# Altium PCB AC_Board.PcbDoc
Units mil, origin at the board's own origin, x right, y up, seen from the top; angles counter-clockwise.
Board outline 6000 x 4000 mil, 2 copper layers (Top Layer, Bottom Layer); 6 components, 27 nets, 18 pads, 6 vias.
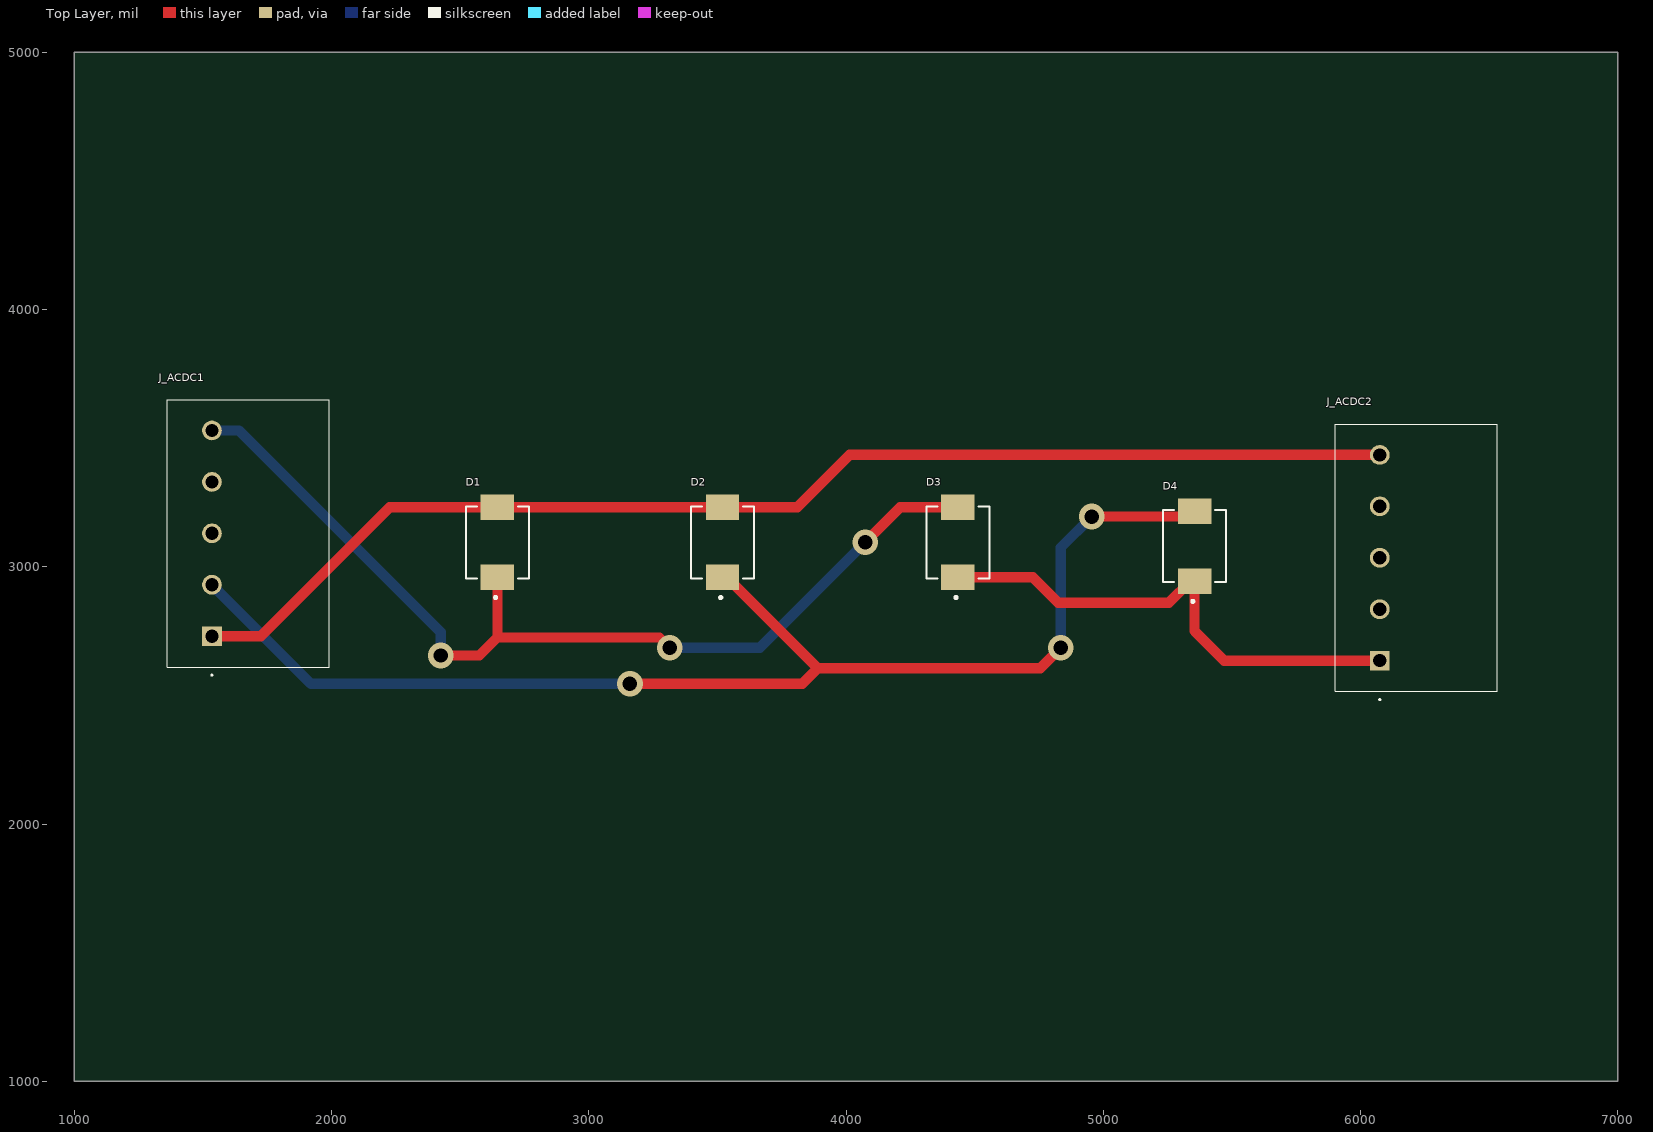
[diagram p0: Top Layer view]
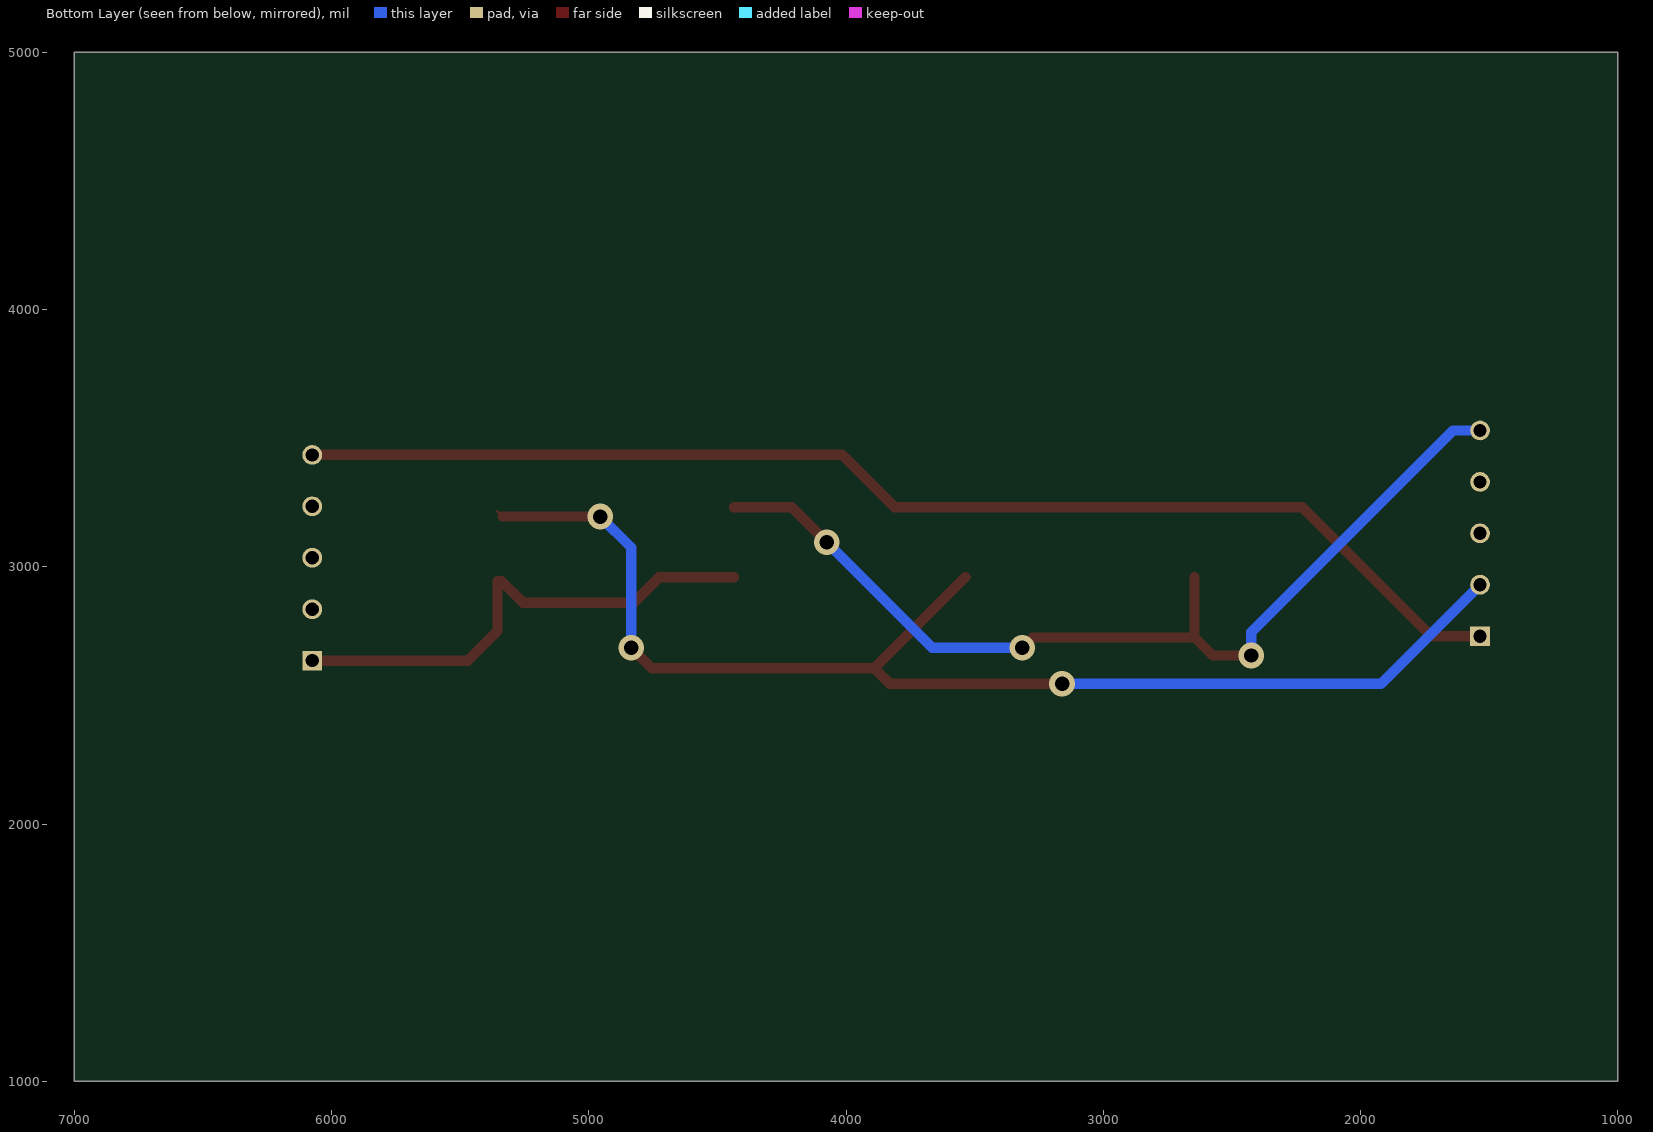
[diagram p1: Bottom Layer view, seen from below]
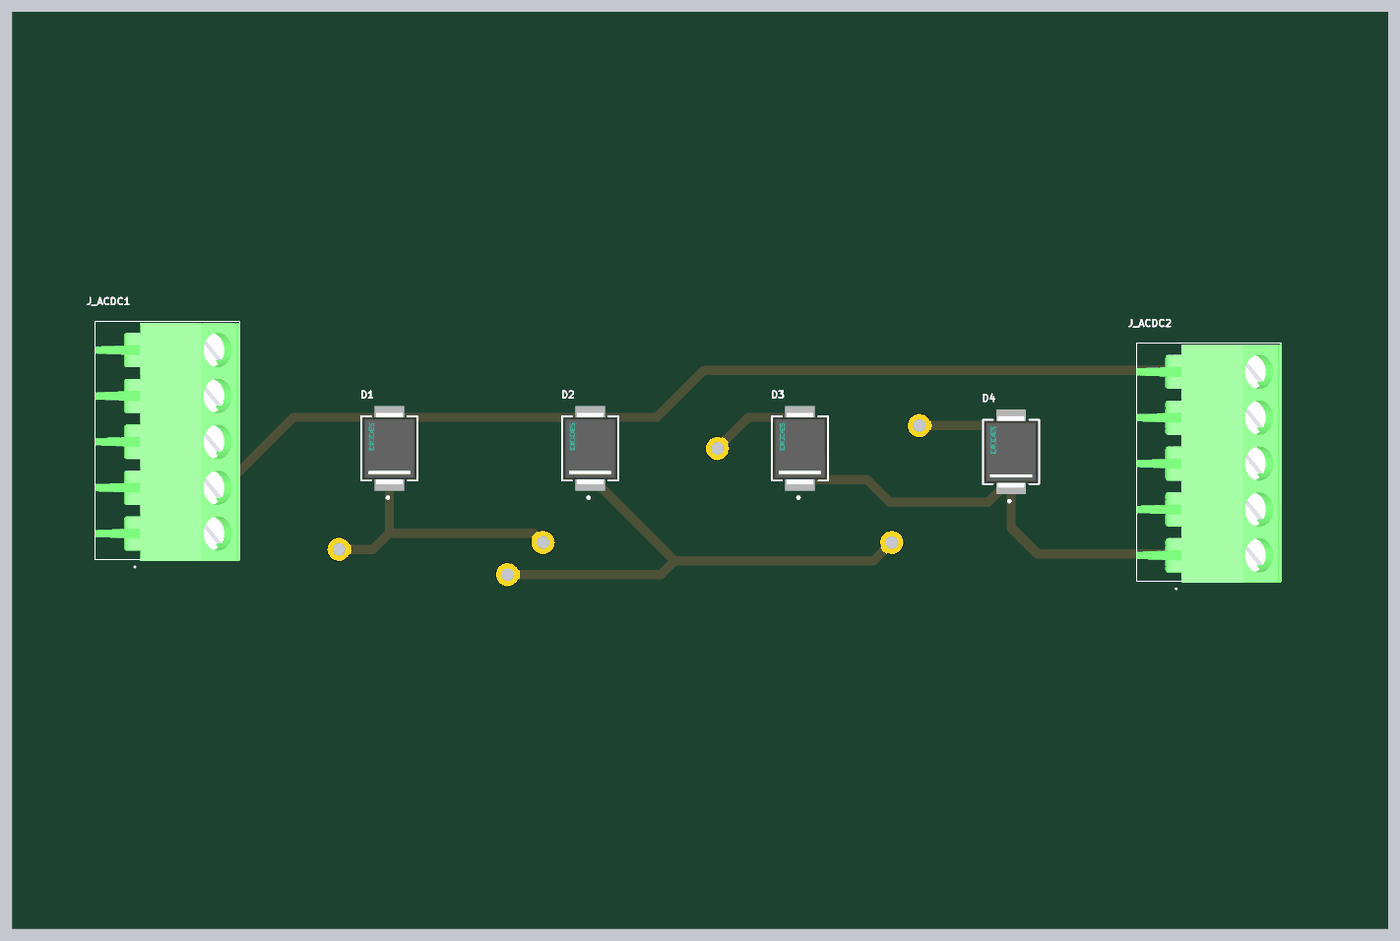
[diagram p2: 3D render of the assembled board from above, using the file's embedded part models]

## Layer stack, top to bottom
Top Solder: solder mask 0.4, Solder Resist, Dk 3.5
Top Layer: signal copper 1.4
Dielectric 1: dielectric 12.6, FR-4, Dk 4.8
Bottom Layer: signal copper 1.4
Bottom Solder: solder mask 0.4, Solder Resist, Dk 3.5

## Board outline
1000,1000 7000,1000 7000,5000 1000,5000

## Design rules (kind name [scope] priority, off if disabled: settings)
Clearance [All] p1: gap=5 ignorepadtopadclearanceinfootprint=FALSE
MinimumSolderMaskSliver [All] p1: minsoldermaskwidth=5
PolygonConnect [All] p1: connectstyle=Relief reliefconductorwidth=10 reliefentries=4 polygonreliefangle="90 Angle" airgapwidth=10
RoutingVias [All] p1: holewidth=28 width=50 viastyle="Through Hole" minholewidth=28 minwidth=50 maxholewidth=28 maxwidth=50
SilkToSilkClearance [All] p1: silktosilkclearance=5
SolderMaskExpansion [All] p1: expansion=4 istentingtop=FALSE
SupplyNets "Schematic Supply Nets_4" [InNet('GND')] p1: voltage=0.000
SupplyNets "Schematic Supply Nets_3" [InNet('3.3V')] p2: voltage=0.000
SupplyNets "Schematic Supply Nets_2" [InNet('REC_Volt')] p3: voltage=0.000
SupplyNets "Schematic Supply Nets_1" [InNet('19V')] p4: voltage=0.000
SupplyNets "Schematic Supply Nets" [InNet('5V_Buck')] p5: voltage=0.000
Width [All] p1: maxlimit=1000 minlimit=5 preferedwidth=10
28 further rules are at their usual default settings.

## Components (designator, comment, footprint, x,y, rotation, side; value= is the part's Value field where it differs from the comment)
D1 "S8MC-13" FP-SMC-MFG 2645,3095 r90 top
D2 "S8MC-13" FP-SMC-MFG 3520,3095 r90 top
D3 "S8MC-13" FP-SMC-MFG 4435,3095 r90 top
D4 "S8MC-13" FP-SMC-MFG 5355,3080 r90 top
J_ACDC1 "1877517" 1877517 1535,2730 r90 top
J_ACDC2 "1877517" 1877517 6075,2635 r90 top

## Footprints (in the part's own frame and the unit in brackets; to place one, negate y for a bottom-side part, rotate by r counter-clockwise, add the part's x,y. Pads: shape width x height; smd on the part's side, far side on the other; paste and mask are expansions set on the pad)
1877517 [mm]
  rect 1.95x1.95 hole 1.3: 1(0,0)
  round 1.95 hole 1.3: 2(5.08,0) 3(10.16,0) 4(15.24,0) 5(20.32,0)
  silkscreen extent -3.9,-11.6 23.36,4.4, body extent -3.19,-11.6 23.21,4.4, height 12.41
FP-SMC-MFG [mm]
  rect 2.5x3.3 smd paste+0 mask+0: 1(-3.45,0) 2(3.45,0)
  silkscreen extent -5.57,-3.11 3.55,3.11, body extent -4.8,-3.21 4.8,3.21, height 0.25

## Part data
D1 D2 D3 D4: library part CMP-12791-000060-1, "DIODE GEN PURP 1KV 8A SMC", Average Rectified Current=8A, Case/Package=SMC, Forward Voltage=985mV, Max Forward Surge Current (Ifsm)=200A, Max Operating Temperature=150°C, Max Repetitive Reverse Voltage (Vrrm)=1kV, Max Reverse Current=10uA, Min Operating Temperature=-65°C, Package Quantity=3000, Contact Plating=Tin, Element Configuration=Single, Forward Current=8A, Height=2.42mm, Lead Free="Lead Free", Length=7.11mm, Max Reverse Voltage (DC)=1kV, Max Surge Current=200A, Mount="Surface Mount", Number of Pins=2, Packaging="Tape and Reel", Peak Non-Repetitive Surge Current=200A, Radiation Hardening=No, Reverse Voltage (DC)=1kV, RoHS Compliant=Yes, Series=-, Weight=0.007408oz, Width=6.22mm
J_ACDC1 J_ACDC2: "Connector", Manufacturer_Name="Phoenix Contact", Mouser Part Number=651-1877517, Datasheet Link=http://www.phoenixcontact.com/de/produkte/1877517/pdf, Height=11.15mm, Manufacturer_Part_Number=1877517, Mouser Price/Stock=https://www.mouser.co.uk/ProductDetail/Phoenix-Contact/1877517?qs=oNl2diMeDgawHeYJ1eCJiQ%3D%3D

## Via types
v1: diameter 100, hole 56, Top Layer to Bottom Layer, 6 vias

## Nets (pads, with @x,y where several pads share a name; then routed paths per layer and width w, separated by ;. In a path a pad name is that pad's centre, name@x,y a point inside that pad or via, vN(x,y) a via of type N, cw(c..) or ccw(c..) an arc to the next point about the centre after c; other vN are vias at no path point)
3.3V: 
5V_Buck: 
19V: 
DIR: 
ENABLE: 
GND: D1.2 D2.2 J_ACDC1.1 J_ACDC2.5 | length 4832
  Top Layer w40: J_ACDC1.1 1725,2730 2225.83,3230.83 D1.2 D2.2 3810.83,3230.83 4015,3435 J_ACDC2.5
GPIO2: 
GPIO15: 
GPIO_IO0: 
Mid_ref: D2.1 D4.2 J_ACDC1.2 | length 5002.4
  Top Layer w10: D2.1 D2.1@3535.75,2959.17 ; D4.2@5334.17,3195 D4.2
  Top Layer w40: v1(3160,2545) 3829.92,2545 3889.92,2605 ; D2.1@3535.75,2959.17 3889.92,2605 ; v1(4835,2685) 4755,2605 3889.92,2605 ; v1(4955,3195) D4.2@5334.17,3195
  Bottom Layer w40: J_ACDC1.2 1920,2545 v1(3160,2545) ; v1(4835,2685) 4835,3075 v1(4955,3195)
NetB1_3: 
NetB2_4: 
NetB3_4: 
NetB4_4: 
NetB_19_1: 
NetB_19_4: 
NetB_19_5: 
NetB_19_6: 
NetB_19_7: 
NetD1_1: D1.1 D3.2 J_ACDC1.5 | length 3828.1
  Top Layer w10: v1(3315,2685) v1@3320,2680
  Top Layer w40: v1(2425,2655) 2575,2655 2645,2725 ; D1.1 2645,2725 ; v1(3315,2685) 3275,2725 2645,2725 ; v1(4075,3095) 4210.83,3230.83 D3.2
  Bottom Layer w40: J_ACDC1.5 1640,3530 2425,2745 v1(2425,2655) ; v1(3315,2685) 3665,2685 v1(4075,3095)
NetD3_1: D3.1 D4.1 J_ACDC2.1 | length 1957.8
  Top Layer w10: D4.1@5339.25,2944.17 D4.1
  Top Layer w40: D3.1 4725.83,2959.17 4825,2860 5255.08,2860 D4.1@5339.25,2944.17 ; D4.1 5355,2750 5470,2635 J_ACDC2.1
NetD5_1: 
NetD6_1: 
REC_Volt: 
RXD0: 
STEP: 
TXD0: 
pads on no net: J_ACDC1.3 J_ACDC1.4 J_ACDC2.2 J_ACDC2.3 J_ACDC2.4